# EAGLE board pmm (EAGLE 9.6.2)
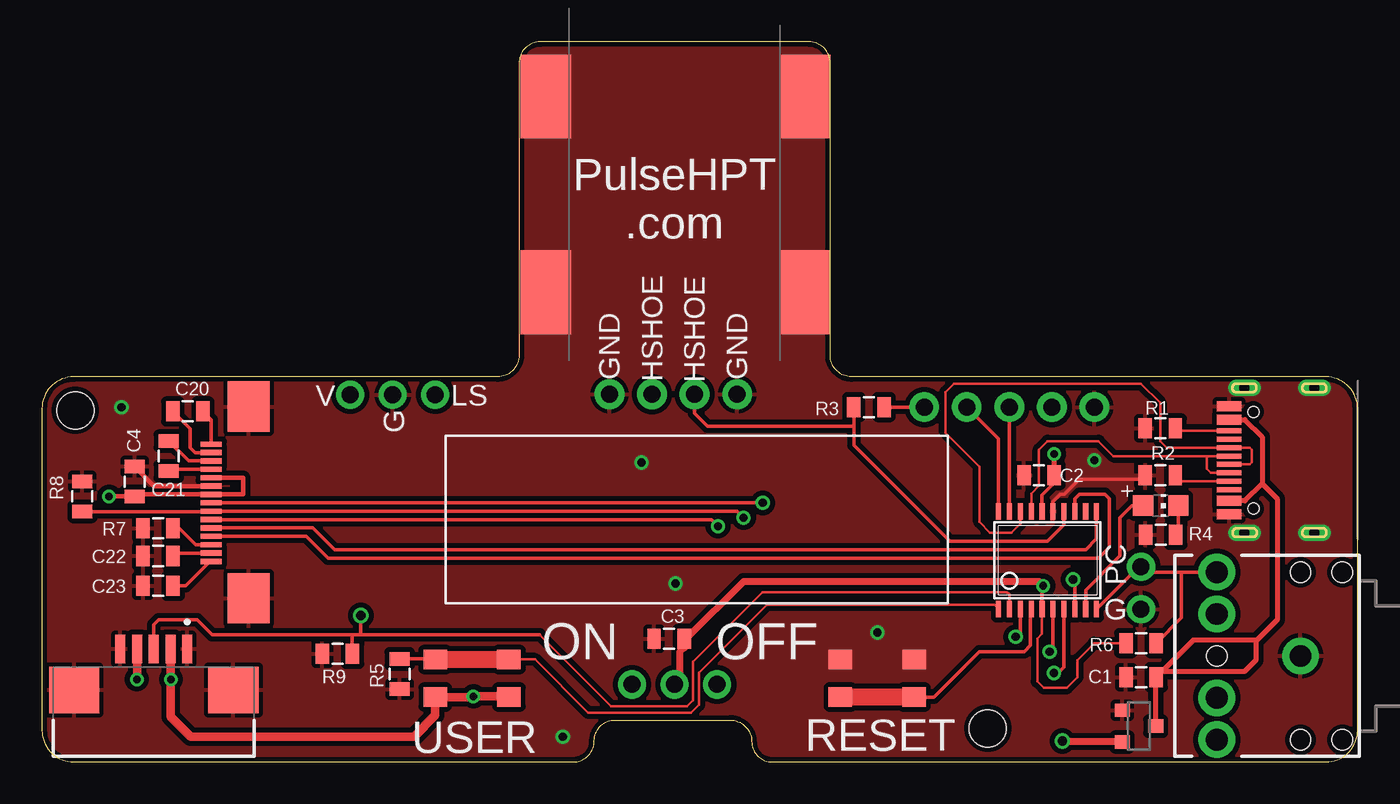
[diagram p0: board, top side]
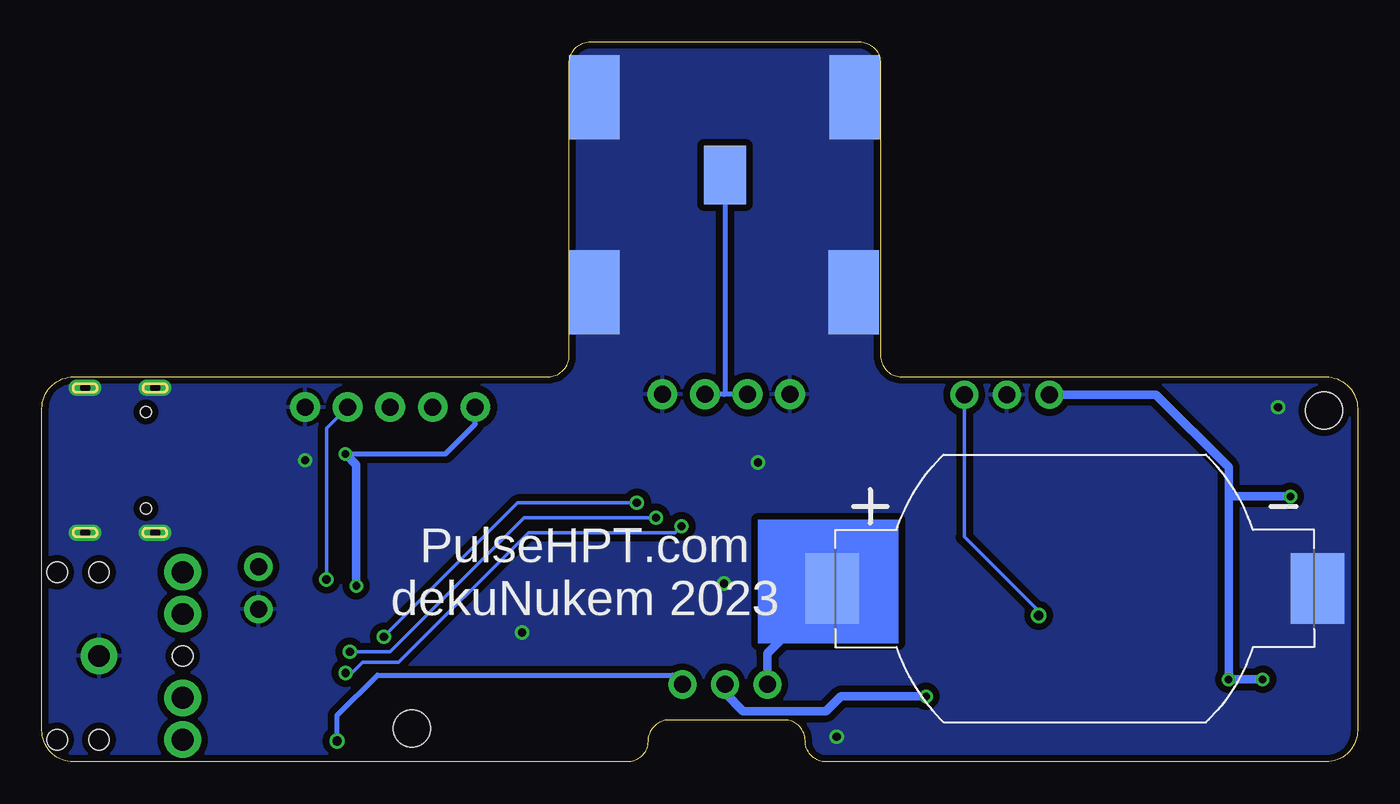
[diagram p1: board, bottom side, seen from below]

Size 78.6 x 43 mm. Coordinates in mm from the lower left corner, seen from the top.
Outline: 78.6,1.91 78.6,21.09 arc90 76.69,23 48.37,23 arc-90 47.1,24.27 47.1,41.73 arc90 45.83,43 29.77,43 arc90 28.5,41.73 28.5,24.27 arc-90 27.23,23 1.91,23 arc90 0,21.09 0,1.91 arc90 1.91,0 31.73,0 arc90 33,1.27 arc-90 34.23,2.5 41.13,2.5 arc-90 42.4,1.23 arc90 43.63,0 76.69,0 arc90 78.6,1.91
Copper layers (1*16): Top 0.035mm / dielectric 1.5mm / Bottom 0.035mm
Design rules "deku_2layer_6mil": minimum track width 6mil, minimum drill 15mil, track to track 6mil, track to pad 6mil, pad to pad 6mil, via to via 6mil, smd to smd 6mil, copper to edge 10mil, drill to drill 6mil, minimum pad ring 7mil, minimum via ring 7mil, stop-mask expansion 4mil, vias tented up to drill 25mil, thermal gap 10mil

## Footprints (pad centres in the part's own frame; a part is rotated, then mirrored left to right if it is on the bottom)
BAT_BU2032SM-G = smd 3.2 x 4.2: + -14.5,0; - 14.5,0
0805 = smd 0.8 x 1.2: 1 -0.9,0; 2 0.9,0
TSSOP20 = smd 0.305 x 0.991: 1 -2.925,-2.918; 2 -2.275,-2.918; 3 -1.625,-2.918; 4 -0.975,-2.918; 5 -0.325,-2.918; 6 0.325,-2.918; 7 0.975,-2.918; 8 1.625,-2.918; 9 2.275,-2.918; 10 2.925,-2.918; 11 2.925,2.918; 12 2.275,2.918; 13 1.625,2.918; 14 0.975,2.918; 15 0.325,2.918; 16 -0.325,2.918; 17 -0.975,2.918; 18 -1.625,2.918; 19 -2.275,2.918; 20 -2.925,2.918
AUDIO-JACK = drill 1.3 pad 2.184: RING 5,5; RSH 5,2.5; SLEEVE 0,0; TIP 5,-5; TSH 5,-2.5 | hole 1.2: 0,5; -2.5,5; -2.5,-5; 0,-5; 5,0
GCT_FFC3B07-05-T = smd 0.6 x 1.7: 1 2,2.45; 2 1,2.45; 3 0,2.45; 4 -1,2.45; 5 -2,2.45 | smd 3 x 2.8: S1 4.75,0; S2 -4.75,0
1X03-CLEANBIG = drill 1.016 pad 1.676: 1 -2.54,0; 2 0,0; 3 2.54,0
CHIP-LED0805 = smd 1.2 x 1.2: A 0,-1.05; C 0,1.05
342_SWICH_FOOT = smd 1.4 x 1.15: P$1 -2.2,-1.125; P$2 -2.2,1.125; P$3 2.2,1.125; P$4 2.2,-1.125
LUL_UG-2864HSWEG01_1.3_WRAPAROUND = smd 0.31 x 1.28: 1 3.5,0; 2 3,0; 3 2.5,0; 4 2,0; 5 1.5,0; 6 1,0; 7 0.5,0; 8 0,0; 9 -0.5,0; 10 -1,0; 11 -1.5,0; 12 -2,0; 13 -2.5,0; 14 -3,0; 15 -3.5,0 | smd 3 x 2.5: 16 5.75,-2.24; 17 -5.7,-2.24
USBC_16P_FOOT = smd 0.6 x 1.45: A1B12 -3.225,3.848; A4B9 -2.425,3.848; B4A9 2.425,3.848; B11A12 3.225,3.848 | smd 0.3 x 1.45: A5 -1.25,3.848; A6 -0.25,3.848; A7 0.25,3.848; A8 1.25,3.848; B5 1.75,3.848; B6 0.75,3.848; B7 -0.75,3.848; B8 -1.75,3.848 | drill 0.6 pad 1 long: P$13 -4.32,2.933; P$14 4.32,2.933; P$15 -4.32,-1.248; P$16 4.32,-1.248 | hole 0.65: -2.89,2.402; 2.89,2.402
SOT23R_INFINEON = smd 0.8 x 0.9: 1 -0.95,-1; 2 0.95,-1; 3 0,1
M2_SCREW_FOOT = hole 2.2: 0,0
SPRING_CONTACT = smd 2.5 x 3.5: P$1 0,0
HOTSHOE_RAIL = smd 3 x 5: P$1 0,0
HOTSHOE_RAIL_NOPASTE = smd 3 x 5: P$1 0,0
1X05 = drill 1.016 pad 1.778: 1 -6.35,0; 2 -3.81,0; 3 -1.27,0; 4 1.27,0; 5 3.81,0
1X04-CLEANBIG = drill 1.016 pad 1.778: 1 -3.81,0; 2 -1.27,0; 3 1.27,0; 4 3.81,0
1X02 = drill 1.016 pad 1.676: 1 -1.27,0; 2 1.27,0

## Placement (x,y rotation side)
BT1  BU2032SM-G  [BAT_BU2032SM-G]  16.9,10.36 0 bottom
C1  1uF  [0805]  65.66,5.06 0 top
C2  1uF  [0805]  59.57,17.13 0 top
C3  2.2uF  [0805]  37.47,7.35 0 top
C4  2.2uF  [0805]  5.54,16.74 270 top
C20  1uF  [0805]  8.72,20.94 0 top
C21  1uF  [0805]  7.58,18.27 90 top
C22  2.2uF  [0805]  6.94,12.3 0 top
C23  1uF  [0805]  6.94,10.52 0 top
IC3  STM32F042F4  [TSSOP20]  60.08,12.05 0 top
J1  AUDIO_JACK_3.5MM_PTH  [AUDIO-JACK]  75.19,6.33 180 top
J2  FFC3B07-05-T  [GCT_FFC3B07-05-T]  6.69,4.3 0 top
JP1  [1X03-CLEANBIG]  37.8,4.63 0 top
JP2  [1X03-CLEANBIG]  20.96,21.93 180 top
LED1  [CHIP-LED0805]  66.83,15.31 270 top
R1  5.1K  [0805]  66.81,19.92 180 top
R2  5.1K  [0805]  66.81,17.13 180 top
R3  10K  [0805]  49.41,21.19 180 top
R4  5.1K  [0805]  66.83,13.57 0 top
R5  10K  [0805]  21.37,5.25 90 top
R6  10K  [0805]  65.66,7.09 180 top
R7  270K  [0805]  6.94,13.95 0 top
R8  10K  [0805]  2.42,15.86 90 top
R9  270K  [0805]  17.66,6.46 180 top
SW3  324_SW  [342_SWICH_FOOT]  49.9,5 180 top
SW4  324_SW  [342_SWICH_FOOT]  25.7,5 0 top
U1  [LUL_UG-2864HSWEG01_1.3_WRAPAROUND]  10.12,15.47 90 top
U2  USBC_16P  [USBC_16P_FOOT]  74.77,18.02 90 top
U4  XC6206_DEV  [SOT23R_INFINEON]  65.54,2.14 270 top
U$1  M2_SCREW_DEV  [M2_SCREW_FOOT]  56.5,2 0 top
U$2  SPRING_CONTACT  [SPRING_CONTACT]  37.8,35.05 0 bottom
U$3  HOTSHOE  [HOTSHOE_RAIL]  30.1,39.73 0 top
U$4  HOTSHOE  [HOTSHOE_RAIL]  45.6,39.73 0 top
U$5  HOTSHOE_NOPASTE  [HOTSHOE_RAIL_NOPASTE]  30.1,28.05 0 bottom
U$6  PINHD5  [1X05]  59.06,21.19 0 top
U$7  PINHD1X4  [1X04-CLEANBIG]  37.72,21.95 0 top
U$8  PINHD1X2  [1X02]  65.66,10.39 90 top
U$9  HOTSHOE_NOPASTE  [HOTSHOE_RAIL_NOPASTE]  45.6,28.05 0 bottom
U$10  HOTSHOE_NOPASTE  [HOTSHOE_RAIL_NOPASTE]  45.6,39.69 0 bottom
U$12  M2_SCREW_DEV  [M2_SCREW_FOOT]  2,21 0 top
U$14  HOTSHOE  [HOTSHOE_RAIL]  30.1,28.05 0 top
U$15  HOTSHOE_NOPASTE  [HOTSHOE_RAIL_NOPASTE]  30.05,39.69 0 bottom
U$16  HOTSHOE  [HOTSHOE_RAIL]  45.6,28.05 0 top

## Library data of the parts
BT1 = BU2032SM-G; AVAILABILITY: In Stock; CHECK_PRICES: https://www.snapeda.com/parts/BU2032SM-G/Memory+Protection+Devices/view-part/?ref=eda; DESCRIPTION: BATTERY HOLDER COIN 20MM SMD; MF: MPD; MP: BU2032SM-G; PACKAGE: None; PRICE: None; PURCHASE-URL: https://www.snapeda.com/api/url_track_click_mouser/?unipart_id=4219599&manufacturer=MPD&part_name=BU2032SM-G&search_term=battery holder; SNAPEDA_LINK: https://www.snapeda.com/parts/BU2032SM-G/Memory+Protection+Devices/view-part/?ref=snap
C1-C4 C20-C23 = clock
IC3 = tx
J1 = SparkFun-Connectors; PROD_ID: CONN-08774; SF_ID: PRT-08032
J2 = FFC3B07-05-T; AVAILABILITY: In Stock; CHECK_PRICES: https://www.snapeda.com/parts/FFC3B07-05-T/Global+Connector+Technology/view-part/?ref=eda; DESCRIPTION: 5 Position FFC, FPC Connector Contacts, Bottom 0.039 (1.00mm) Surface Mount, Right Angle; MF: Global Connector Technology; MP: FFC3B07-05-T; PACKAGE: None; PRICE: None; SNAPEDA_LINK: https://www.snapeda.com/parts/FFC3B07-05-T/Global+Connector+Technology/view-part/?ref=snap
JP1 JP2 U$6-U$8 = adafruit_changed
LED1 = adafruit
R1-R3 R5 R6 R8 R9 = joyAnalog
R4 R7 = SparkFun-Passives
SW3 SW4 U$1 U$12 = 3pos_slide_switch_centered
U1 = lul
U2 = my_usbc_16p
U4 = 3pos_slide_switch
U$2-U$5 U$9 U$10 U$14-U$16 = apricot

## Nets
+3V3: C2.2 C3.2 C4.2 IC3.5 IC3.16 J2.2 J2.4 JP1.2 JP2.3 R3.1 R6.2 SW4.P$1 SW4.P$4 U1.5 U1.7 U$6.1
+5V: C1.2 U2.A4B9 U2.B4A9 U4.3
BUTTON1: IC3.4 SW3.P$2 SW3.P$3
BUTTON2: IC3.1 R5.2 SW4.P$2 SW4.P$3
GND: BT1.- C1.1 C2.1 C3.1 C4.1 C22.1 C23.1 IC3.15 J1.SLEEVE J2.1 J2.5 J2.S1 J2.S2 JP2.2 R1.2 R2.2 R4.1 R5.1 R7.1 R8.2 R9.2 SW3.P$1 SW3.P$4 U1.6 U1.16 U1.17 U2.A1B12 U2.B11A12 U2.P$13 U2.P$14 U2.P$15 U2.P$16 U4.1 U$3.P$1 U$4.P$1 U$5.P$1 U$6.5 U$7.1 U$7.4 U$8.1 U$9.P$1 U$10.P$1 U$14.P$1 U$15.P$1 U$16.P$1
LIGHT_SENSE: IC3.2 J2.3 JP2.1 R9.1
N$2: IC3.14 R3.2 U$2.P$1 U$7.2 U$7.3
N$3: JP1.3 U4.2
N$5: LED1.C R4.2
N$31: R1.1 U2.B5
N$33: R2.1 U2.A5
N$35: C20.2 U1.1
N$36: C20.1 U1.2
N$37: C21.2 U1.3
N$38: C21.1 U1.4
N$39: R7.2 U1.13
N$40: C22.2 U1.14
N$41: C23.2 U1.15
OLED_CS: IC3.3 U1.8
OLED_DC: IC3.7 U1.10
OLED_MOSI: IC3.13 U1.12
OLED_RESET: IC3.6 R8.1 U1.9
OLED_SCK: IC3.11 U1.11
PC_SYNC: IC3.10 J1.TIP R6.1 U$8.2
SWCLK: IC3.20 U$6.2
SWDIO: IC3.19 U$6.3
UART2_TX: IC3.8 U$6.4
USB_DN: IC3.17 U2.A7 U2.B7
USB_DP: IC3.18 U2.A6 U2.B6
USER_LED: IC3.9 LED1.A
VBAT: BT1.+ JP1.1

## Tracks (layer width: path | path; a pad name or v marks a point on that pad's centre or on a via)
+3V3  (via drill 0.45)
  Top 0.152: IC3.5 59.75,7.66 59.47,7.37 59.47,4.81 59.85,4.43 61.22,4.43 61.85,5.06 61.85,6.08 62.87,7.09 R6.2
  Top 0.203: IC3.16 59.75,15.91 60.47,16.63 C2.2 | IC3.5 59.75,10.45 v59.82,10.52 | 5.53,15.86 C4.2 | R3.1 U$6.1
  Top 0.254: v4.02,15.86 5.53,15.86 | C4.2 5.67,15.97 U1.7 12.02,15.97 12.02,16.98 U1.5
  Top 0.305: v60.46,18.4 60.47,18.38 C2.2
  Top 0.406: v59.82,10.52 59.57,10.78 41.91,10.78 38.48,7.35 C3.2 | 38.37,6.84 38.1,6.57 38.1,4.93 JP1.2
  Top 0.508: J2.4 5.69,4.95 v5.67,4.93 | J2.2 7.69,4.95 v7.7,4.93 7.7,2.7 8.89,1.5 22.23,1.5 23.5,2.78 SW4.P$1 25.74,3.88 v25.79,3.92 27.86,3.92 SW4.P$4 | C3.2 38.37,6.84
  Bottom 0.305: v60.46,18.4 54.49,18.4 52.71,20.17 U$6.1
  Bottom 0.508: v60.46,18.4 59.82,17.76 v59.82,10.52 | v5.67,4.93 v7.7,4.93 7.7,15.86 | JP1.2 37.8,4.12 36.71,3.03 31.75,3.03 30.86,3.92 v25.79,3.92 | JP2.3 12.04,21.93 7.7,17.59 7.7,15.86 | v4.02,15.86 7.7,15.86
+5V
  Top 0.305: U2.B4A9 71.87,20.44 72.9,19.41 72.9,16.62 | U2.A4B9 71.87,15.59 72.9,16.62 | 72.9,16.62 73.79,15.73 73.79,8.49 72.57,7.27 | C1.2 68.77,7.27 72.57,7.27 | 72.57,7.27 72.52,7.22 72.52,6.08 71.84,5.39 66.89,5.39 C1.2 | U4.3 66.54,5.03 C1.2
BUTTON1
  Top 0.203: IC3.4 59.05,9.08 59.05,6.96 58.68,6.59 56.01,6.59 53.3,3.88 SW3.P$2
  Top 1.016: SW3.P$2 SW3.P$3
BUTTON2
  Top 0.152: IC3.1 56.9,9.38 43.31,9.38 39.25,5.32 39.25,3.41 38.79,2.95 32.63,2.95 29.46,6.12 SW4.P$3
  Top 0.203: R5.2 23.47,6.15 SW4.P$2
  Top 1.016: SW4.P$2 SW4.P$3
GND  (via drill 0.5)
  Top 0.203: R2.2 65.65,16.87 61.98,16.87 61.09,15.98 60.84,15.98 60.4,15.55 IC3.15
  Top 0.254: U1.6 6.7,16.48 C4.1
  other vias: 35.82,17.89 37.85,10.65 4.76,21.18 62.87,18.02 31.12,1.5 49.91,7.73
  pour Top (isolate 0.305): -6.35,55 -6.35,-13 86.14,-13 86.14,55
  pour Bottom (isolate 0.406): -4.5,50 83.5,50 83.5,-9 -4.5,-9
LIGHT_SENSE  (via drill 0.55)
  Top 0.152: 29.72,7.6 33.99,3.33 38.54,3.33 38.89,3.69 38.89,5.98 43.06,10.14 57.66,10.14 57.8,10 IC3.2
  Top 0.203: 29.72,7.6 19.05,7.6 | 19.05,7.6 18.55,7.6 | 18.55,7.6 10.16,7.6 9.27,8.49 6.99,8.49 6.69,8.19 J2.3 | v19.05,8.74 19.05,7.6 | R9.1 18.55,6.47 18.55,7.6
  Bottom 0.203: JP2.1 23.5,13.44 19.05,9 v19.05,8.74
N$2
  Top 0.203: IC3.14 61.05,14.16 60.08,13.19 54.23,13.19 48.51,18.91 48.51,20.05 | R3.2 48.51,20.05 | U$7.3 38.99,20.81 39.76,20.05 48.51,20.05
  Bottom 0.305: U$7.2 37.85,21.95 | 37.85,21.95 U$7.3 | 37.85,21.95 37.8,22 U$2.P$1
N$3  (via drill 0.55)
  Top 0.406: 64.49,1.24 U4.2 | v60.96,1.25 64.47,1.25
  Top 0.508: 64.47,1.25 64.49,1.24
  Bottom 0.305: v60.96,1.25 60.96,2.77 58.55,5.19 40.9,5.19 JP1.3
N$5
  Top 0.203: LED1.C 67.88,13.72 R4.2
N$31
  Top 0.152: U2.B5 67.86,19.77 R1.1
N$33
  Top 0.152: R2.1 68.07,16.77 U2.A5
N$35
  Top 0.203: C20.2 10.12,20.44 U1.1
N$36
  Top 0.203: C20.1 8.85,19.91 8.85,18.78 9.15,18.48 U1.2
N$37
  Top 0.203: U1.3 8.76,17.98 7.58,19.16 C21.2
N$38
  Top 0.203: C21.1 7.68,17.48 U1.4
N$39
  Top 0.203: U1.13 9.19,12.97 8.21,13.95 R7.2
N$40
  Top 0.203: U1.14 8.02,12.47 C22.2
N$41
  Top 0.203: U1.15 10.05,11.97 8.59,10.52 C23.2
OLED_CS  (via drill 0.5)
  Top 0.203: U1.8 v43.06,15.47 | v58.17,7.47 58.45,7.75 IC3.3
  Bottom 0.203: v43.06,15.47 50.17,15.47 v58.17,7.47
OLED_DC  (via drill 0.5)
  Top 0.203: U1.10 39.99,14.47 v40.39,14.08 | v60.46,5.32 60.71,5.32 61.05,5.66 IC3.7
  Bottom 0.203: v40.39,14.08 40.77,13.7 49.53,13.7 57.28,5.95 59.44,5.95 60.08,5.32 v60.46,5.32
OLED_MOSI
  Top 0.203: IC3.13 61.7,15.7 61.98,15.98 63.5,15.98 63.76,15.73 63.76,12.81 63.12,12.17 17.1,12.17 15.8,13.47 U1.12
OLED_RESET  (via drill 0.5)
  Top 0.203: v41.91,14.59 41.52,14.97 U1.9 10.1,14.96 R8.1 | v60.2,6.59 60.4,6.78 IC3.6
  Bottom 0.203: v41.91,14.59 49.79,14.59 57.79,6.59 v60.2,6.59
OLED_SCK
  Top 0.203: IC3.11 63,13.32 62.36,12.68 38.74,12.68 17.48,12.68 16.19,13.97 U1.11
PC_SYNC
  Top 0.203: J1.TIP 68.08,11.33 | 68.08,11.33 66,11.33 U$8.2 65.54,11.66 IC3.10 | R6.1 68.08,8.61 68.08,11.33
SWCLK
  Top 0.203: IC3.20 57.15,19.29 U$6.2
SWDIO
  Top 0.203: U$6.3 57.8,21.18 IC3.19
UART2_TX  (via drill 0.5)
  Top 0.203: IC3.8 61.7,10.8 v61.6,10.9
  Bottom 0.203: v61.6,10.9 61.6,19.92 U$6.4
USB_DN
  Top 0.152: U2.A7 69.6,18.27 | U2.B7 69.84,17.27 69.6,17.51 69.6,18.27 | IC3.17 59.1,16.02 59.57,16.49 59.57,18.65 60.08,19.16 63.12,19.16 64.02,18.27 69.6,18.27
USB_DP
  Top 0.152: U2.A6 72.14,17.77 72.27,17.89 72.27,18.65 72.15,18.77 U2.B6 67.2,18.77 66.81,19.16 66.81,21.44 65.66,22.59 54.49,22.59 53.98,22.08 53.98,19.67 56.01,17.63 56.01,14.33 56.65,13.7 57.92,13.7 58.45,14.23 IC3.18
USER_LED
  Top 0.203: IC3.9 62.35,10.26 64.39,12.3 64.39,14.59 65.12,15.31 LED1.A
VBAT
  Bottom 0.508: BT1.+ 35.26,6.5 JP1.1
(copper drawn outside any net)
  shapes: Bottom area x1

## Text on the board
tNames: 1.2mm Thick / ENIG gold finish / FDX0039B2 Spring contact | PulseHPT / .com | HSHOE | HSHOE | GND | GND | V | LS | G | PC | G | ON | OFF | RESET | USER
bNames: PulseHPT.com / dekuNukem 2023
tDocu: CLK | DIO | TX | G | 3V3